# Altium PCB Node.PcbDoc
Units mm, origin at the board's own origin, x right, y up, seen from the top; angles counter-clockwise.
Board outline 152.4 x 101.6 mm, 2 copper layers (Top Layer, Bottom Layer); 46 components, 43 nets, 215 pads, 0 vias.
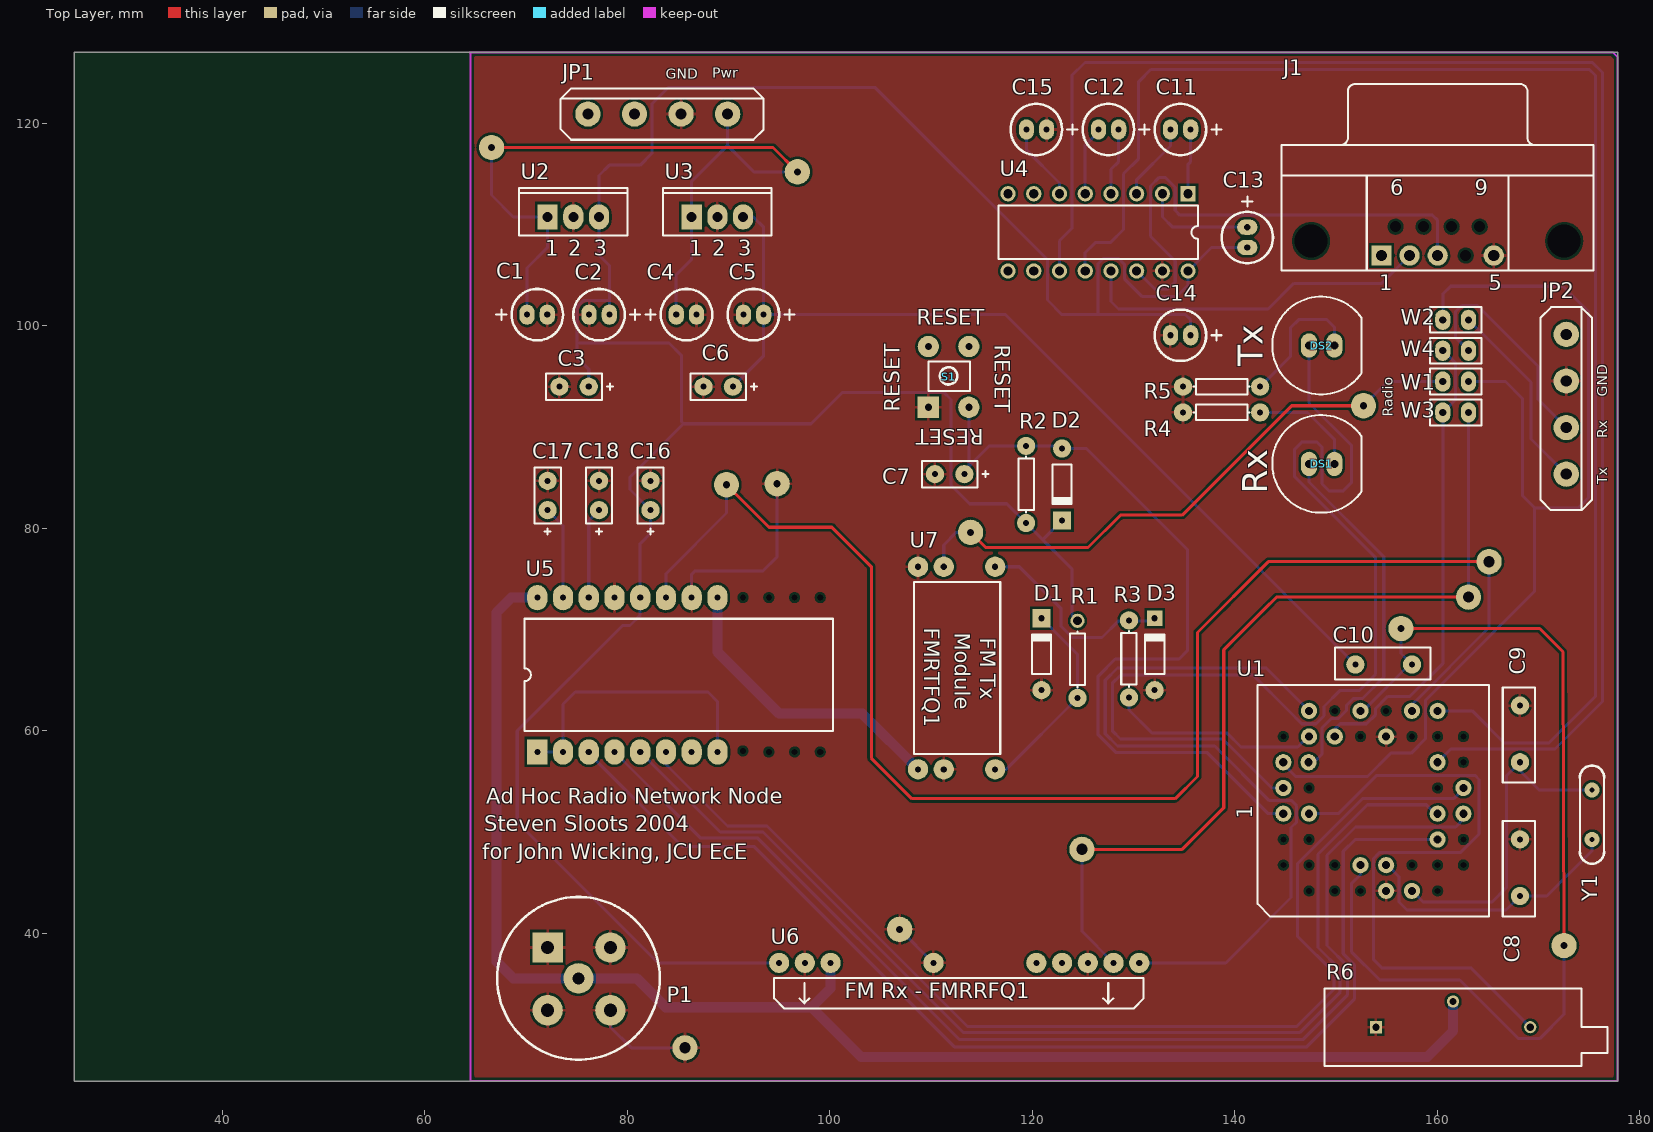
[diagram p0: Top Layer view]
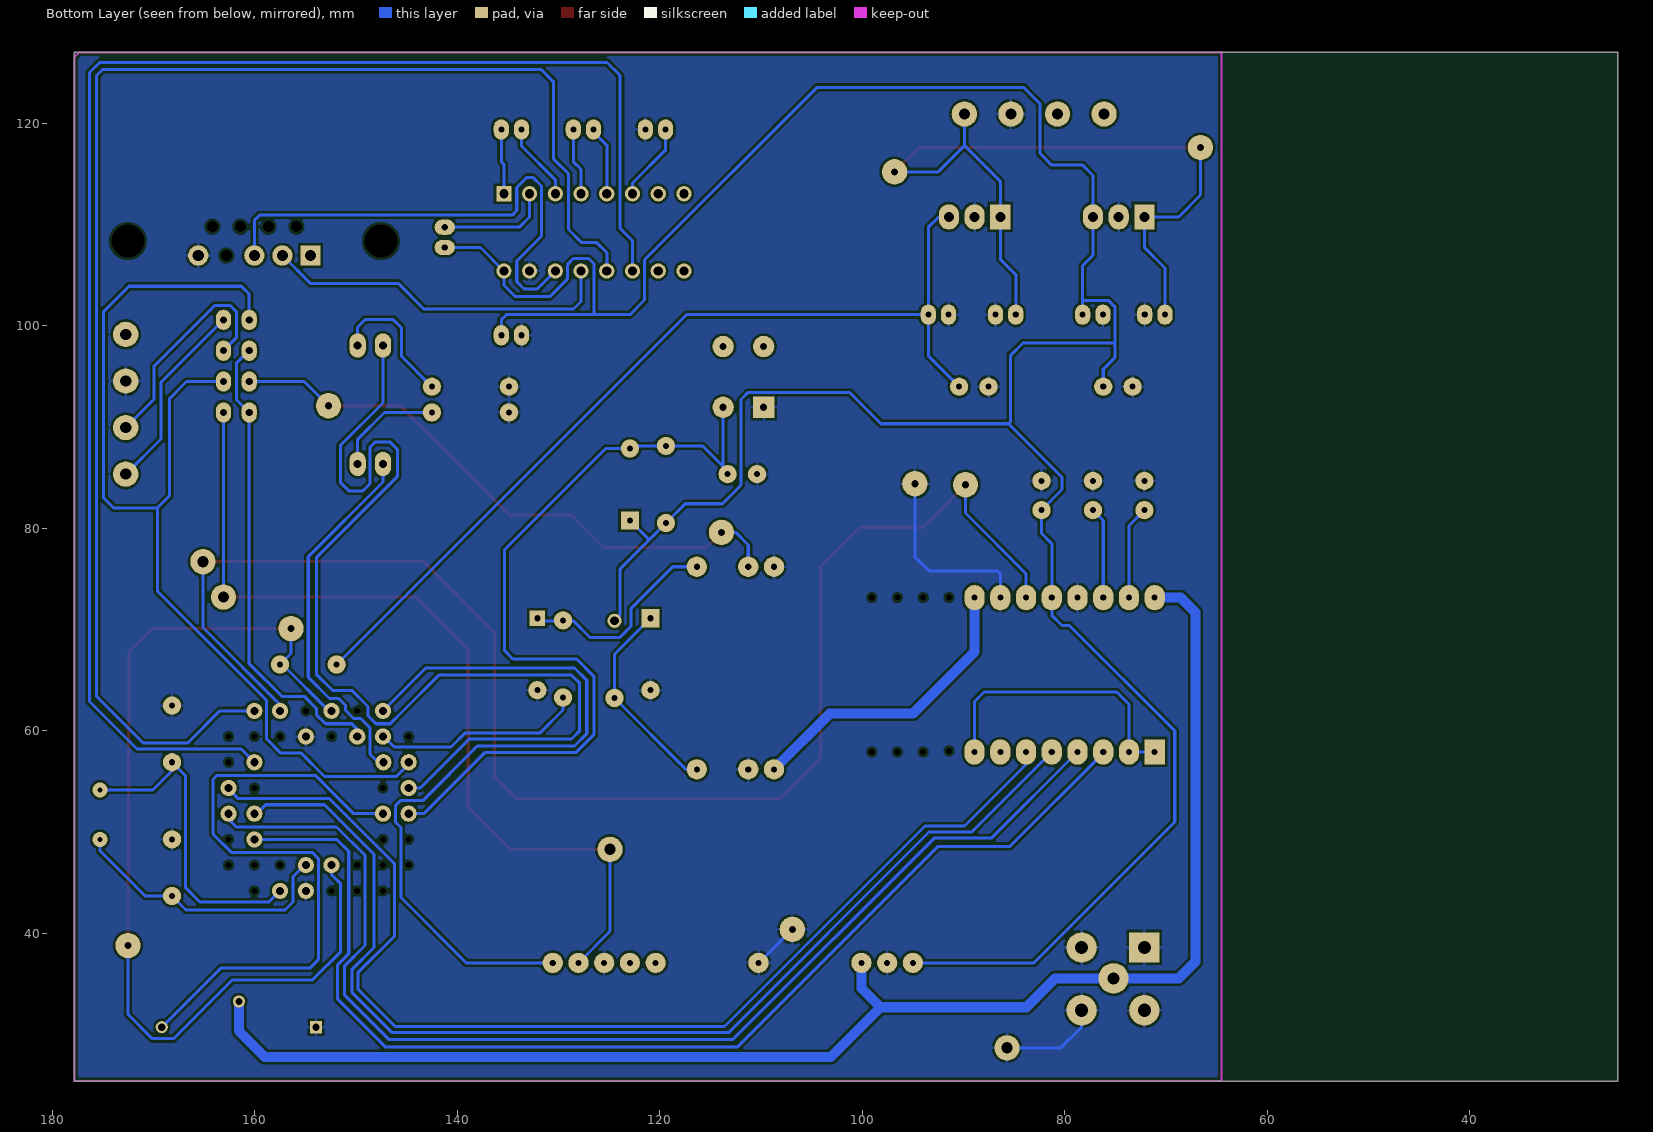
[diagram p1: Bottom Layer view, seen from below]

## Layer stack, top to bottom
Top Layer: signal copper 0.0356
Dielectric: dielectric 0.32, FR-4, Dk 4.8
Bottom Layer: signal copper 0.0356

## Board outline
25.4,25.4 177.8,25.4 177.8,127 25.4,127

## Design rules (kind name [scope] priority, off if disabled: settings)
Clearance [All] p1: gap=0.254
ComponentClearance [All] p1: gap=0.254 collisioncheckmode=0
HoleSize [All] p1 off: absolutevalues=TRUE maxlimit=2.54 minlimit=0.025 maxpercent=80.000 minpercent=20.000
PlaneConnect [All] p1: planeconnectstyle=Relief reliefexpansion=0.508 reliefentries=4 reliefconductorwidth=0.5 reliefairgap=0.254
PolygonConnect [All] p1: connectstyle=Relief reliefconductorwidth=0.254 reliefentries=4 polygonreliefangle="90 Angle"
RoutingLayers [All] p1: top layer="Not Used" bottom layer=Any
RoutingVias [All] p1: holewidth=0.711 width=1.27 viastyle="Through Hole" minholewidth=0.711 minwidth=1.27 maxholewidth=0.711 maxwidth=1.27
SolderMaskExpansion [All] p1: expansion=0.102
TestPointUsage [All] p1: valid=0 allowmultiple=FALSE
Testpoint [All] p1: side=15 testpointundercomponent=TRUE minsize=1.016 maxsize=2.54 preferedsize=1.524 minholesize=0 maxholesize=1.016 preferedholesize=0.813 testpointgrid=0.025 style=1023 order=1234567890
Width Width_2 [InNet('NetU5_16')] p1: maxlimit=1 minlimit=0.254 preferedwidth=0.254 toplayer_prefwidth=1 bottomlayer_prefwidth=1 minimp=50.000000 maximp=50.000000 favimp=50.000000
Width Width_1 [InNet('NetP1_1')] p2: maxlimit=1 minlimit=0.254 preferedwidth=0.254 toplayer_minwidth=1 toplayer_prefwidth=1 bottomlayer_minwidth=1 bottomlayer_prefwidth=1 minimp=50.000000 maximp=50.000000 favimp=50.000000
Width [All] p3: maxlimit=0.4 minlimit=0.2 preferedwidth=0.254 toplayer_prefwidth=0.3 bottomlayer_prefwidth=0.3 minimp=50.000000 maximp=50.000000 favimp=50.000000
14 further rules are at their usual default settings.

## Components (designator, comment, footprint, x,y, rotation, side; value= is the part's Value field where it differs from the comment)
C1 "Cap" "2mm Pol. Cap" 70.104,101.092 r0 top
C2 "Cap" "2mm Pol. Cap" 78.232,101.092 r180 top
C3 "Cap" "5mm Tant. Cap" 76.2,93.98 r180 top
C4 "Cap" "2mm Pol. Cap" 84.836,101.092 r0 top
C5 "Cap" "2mm Pol. Cap" 93.472,101.092 r180 top
C6 "Cap" "5mm Tant. Cap" 90.424,93.98 r180 top
C7 "0.1uF" "5mm Tant. Cap" 113.284,85.344 r180 top
C8 "Cap" "5.6mm Ceramic Cap" 168.148,43.688 r90 top
C9 "Cap" "5.6mm Ceramic Cap" 168.148,56.896 r90 top
C10 "Cap" "5.6mm Ceramic Cap" 151.892,66.548 r0 top
C11 "Cap Pol1" "2mm Pol. Cap" 135.636,119.38 r180 top
C12 "Cap Pol1" "2mm Pol. Cap" 128.524,119.38 r180 top
C13 "Cap Pol1" "2mm Pol. Cap" 141.224,109.728 r270 top
C14 "Cap Pol1" "2mm Pol. Cap" 135.636,99.06 r180 top
C15 "Cap Pol1" "2mm Pol. Cap" 121.412,119.38 r180 top
C16 "" "5mm Tant. Cap" 82.296,81.788 r90 top
C17 "" "5mm Tant. Cap" 72.136,81.788 r90 top
C18 "" "5mm Tant. Cap" 77.216,81.788 r90 top
D1 "3.3V BZX55-C3V3" DIO7.1-3.9X1.9#1 120.904,67.564 r90 top
D2 "1N914 Diode" DIO7.1-3.9X1.9#1 122.936,84.328 r270 top
D3 "3.3V Zener" DIO7.1-3.9X1.9#2 132.08,67.564 r90 top
DS1 "LED0" LED 147.32,86.36 r0 top
DS2 "LED0" LED 147.32,98.044 r0 top
J1 "D Connector 9" DSUB1.385-2H9 160.02,117.856 r0 top
JP1 "Header 4" "4 Way Terminal Block" 89.916,120.904 r180 top
JP2 "Header 4" "4 Way Terminal Block" 172.72,85.344 r90 top
P1 "BNC" "PCB BNC Connector - duplicate" 72.136,38.608 r0 top
R1 "" AXIAL-0.3#1 124.46,67.056 r90 top
R2 "Res1" AXIAL-0.3#2 119.38,84.328 r270 top
R3 "Res1" AXIAL-0.3#2 129.54,67.1 r270 top
R4 "Res1" AXIAL-0.3#2 138.684,91.44 r180 top
R5 "Res1" AXIAL-0.3#2 138.684,93.98 r180 top
R6 "RPot2" VR2 161.544,32.004 r0 top
S1 "SW-PB" "Reset Switch - duplicate" 109.728,91.948 r90 top
U1 "PIC18C452_PLCC" "PLCC Socket 44 way" 144.78,44.196 r90 top (schematic designator *)
U2 "LM340T5.0" SFM-T3/A4.7V 74.676,110.744 r0 top
U3 "LM340T5.0" SFM-T3/A4.7V 88.9,110.744 r0 top
U4 "MAX232EPE" DIP-16/X1.5 126.492,109.22 r180 top
U5 "AD8369" "24 pin DIP socket for TSSOP" 71.12,57.912 r90 top
U6 "FMRRFQ1 FM Rx" FMRRFQ1 94.996,37.084 r0 top
U7 "FMRTFQ1 FM Tx" FMRTFQ1 116.332,76.2 r270 top
W1 "Jumper" RAD-0.1 163.068,94.488 r180 top
W2 "Jumper" RAD-0.1 160.528,100.584 r0 top
W3 "Jumper" RAD-0.1 163.068,91.44 r180 top
W4 "Jumper" RAD-0.1 163.068,97.536 r180 top
Y1 "XTAL" XTAL 175.26,49.276 r90 top

## Footprints (in the part's own frame and the unit in brackets; to place one, negate y for a bottom-side part, rotate by r counter-clockwise, add the part's x,y. Pads: shape width x height; smd on the part's side, far side on the other; paste and mask are expansions set on the pad)
"2mm Pol. Cap" [mm]
  oval 1.5x2 hole 0.6: 1(0,0) 2(2,0)
  silkscreen extent -3.05,-2.54 3.56,2.54
"4 Way Terminal Block" [mm]
  round 2.5 hole 1.1: 1(0,0) 2(4.6,0) 3(9.2,0) 4(13.8,0)
  silkscreen extent -3.56,-2.54 16.5,2.54
"5.6mm Ceramic Cap" [mm]
  round 1.8 hole 0.6: 1(0,0) 2(5.6,0)
  silkscreen extent -2,-1.5 7.4,1.7
"5mm Tant. Cap" [mm]
  round 1.8 hole 0.6: 1(0,0) 2(2.9,0)
  silkscreen extent -2.4,-1.3 4.2,1.3
"24 pin DIP socket for TSSOP" [mm]
  rect 2.5x2 hole 0.6: 1(0,0)
  oval 2.5x2 hole 0.6: 2(0,-2.54) 3(0,-5.08) 4(0,-7.62) 5(0,-10.16) 6(0,-12.7) 7(0,-15.24) 8(0,-17.8) 9(15.24,0) 10(15.24,-2.54) 11(15.24,-5.08) 12(15.24,-7.62) 13(15.24,-10.16) 14(15.24,-12.7) 15(15.24,-15.24) 16(15.24,-17.78)
  round 0 hole 0.6: ""(0,-22.86) ""(0,-25.4) ""(0,-27.94) ""(0.1,-20.3) ""(15.24,-22.86) ""(15.24,-20.32) ""(15.24,-27.94) ""(15.24,-25.4)
  silkscreen extent 2.08,-29.21 13.16,1.27
AXIAL-0.3#1 [mm]
  round 1.8 hole 0.6: 1(-3.81,0)
  round 1.4 hole 0.85: 2(3.81,0)
  silkscreen extent -2.77,-0.76 2.77,0.76
AXIAL-0.3#2 [mm]
  round 1.8 hole 0.6: 1(-3.81,0) 2(3.81,0)
  silkscreen extent -2.77,-0.76 2.77,0.76
DIO7.1-3.9X1.9#1 [mm]
  round 1.8 hole 0.6: 1(-3.55,0)
  rect 1.8x1.8 hole 0.6: 2(3.55,0)
  silkscreen extent -1.95,-0.95 2.05,0.95
DIO7.1-3.9X1.9#2 [mm]
  round 1.8 hole 0.6: 1(-3.55,0)
  rect 1.5x1.5 hole 0.6: 2(3.55,0)
  silkscreen extent -1.95,-0.95 2.05,0.95
DIP-16/X1.5 [mm]
  rect 1.5x1.5 hole 0.9: 1(-8.89,-3.81)
  round 1.5 hole 0.9: 2(-6.35,-3.81) 3(-3.81,-3.81) 4(-1.27,-3.81) 5(1.27,-3.81) 6(3.81,-3.81) 7(6.35,-3.81) 8(8.89,-3.81) 9(8.89,3.81) 10(6.35,3.81) 11(3.81,3.81) 12(1.27,3.81) 13(-1.27,3.81) 14(-3.81,3.81) 15(-6.35,3.81) 16(-8.89,3.81)
  silkscreen extent -9.85,-2.65 9.85,2.65
DSUB1.385-2H9 [mm]
  rect 2x2 hole 1.09: 1(-5.54,-10.92)
  round 2 hole 1.09: 2(-2.77,-10.92) 3(0,-10.92) 5(5.54,-10.92)
  round 0 hole 1.09: 4(2.77,-10.92) 6(-4.155,-8.08) 7(-1.385,-8.08) 8(1.385,-8.08) 9(4.155,-8.08)
  round 0 hole 3.26: 10(-12.495,-9.5) 11(12.495,-9.5)
  silkscreen extent -15.4,-12.4 15.4,6
FMRRFQ1 [mm]
  round 2 hole 0.6: 1(0,0) 2(2.54,0) 3(5.08,0) 7(15.24,0) 11(25.4,0) 12(27.94,0) 13(30.48,0) 14(33.02,0) 15(35.56,0)
  silkscreen extent -0.5,-4.5 36,-1.5
FMRTFQ1 [mm]
  round 2 hole 0.6: 1(0,0) 2(0,-5.08) 3(0,-7.62) 4(20,0) 5(20,-5.08) 6(20,-7.62)
  silkscreen extent 1.5,-8 18.5,0.5
LED [mm]
  oval 1.6x2.4 hole 0.8: 1(0,0) 2(2.5,0)
  silkscreen extent -3.62,-4.82 5.2,4.82
"PCB BNC Connector - duplicate" [mm]
  round 3 hole 1.2: 0(3.048,-3.048)
  rect 3x3 hole 1.3: 1(0,0)
  round 3 hole 1.3: 2(6.2,0) 3(0,-6.2) 4(6.2,-6.2)
  silkscreen extent -4.98,-11.08 11.08,4.98
"PLCC Socket 44 way" [mm]
  round 0 hole 0.6: 1(10.16,-2.54) 4(5.08,0) 5(5.08,-2.54) 6(2.54,0) 7(0,-2.54) 8(2.54,-2.54) 9(0,-5.08) 10(2.54,-5.08) 11(0,-7.62) 16(2.54,-12.7) 17(0,-15.24) 18(2.54,-17.78) 19(2.54,-15.24) 20(5.08,-17.78) 25(10.16,-15.24) 26(12.7,-17.78) 28(15.24,-17.78) 30(15.24,-15.24) 32(15.24,-12.7) 33(17.78,-10.16) 36(15.24,-7.62) 37(17.78,-5.08) 40(15.24,0)
  round 1.6 hole 0.8: 2(7.62,0) 3(7.62,-2.54) 12(2.54,-7.62) 13(0,-10.16) 14(2.54,-10.16) 15(0,-12.7) 21(5.08,-15.24) 22(7.62,-17.78) 23(7.62,-15.24) 24(10.16,-17.78) 27(12.7,-15.24) 29(17.78,-15.24) 31(17.78,-12.7) 34(15.24,-10.16) 35(17.78,-7.62) 38(15.24,-5.08) 39(17.78,-2.54) 41(15.24,-2.54) 42(12.7,0) 43(12.7,-2.5) 44(10.16,0)
  silkscreen extent -2.54,-20.32 20.32,2.54
RAD-0.1 [mm]
  oval 1.5x2 hole 0.7: 1(0,0) 2(2.54,0)
  silkscreen extent -1.27,-1.27 3.81,1.27
"Reset Switch - duplicate" [mm]
  rect 2.1x2.1 hole 0.7: 1(0,0)
  round 2.1 hole 0.7: 2(0,-4) ""(6,-4) ""(6,0)
  silkscreen extent 1.6,-4.1 4.5,0
SFM-T3/A4.7V [mm]
  rect 2x2.5 hole 1: 1(-2.54,0)
  oval 2x2.5 hole 1: 2(0,0) 3(2.54,0)
  silkscreen extent -5.35,-1.85 5.35,2.85
VR2 [mm]
  rect 1.2x1.2 hole 0.7: 1(-7.62,-1.27)
  round 1.2 hole 0.7: 2(0,1.27) 3(7.62,-1.27)
  silkscreen extent -12.7,-5.08 15.24,2.54
XTAL [mm]
  round 1.5 hole 0.5: 1(0,0) 2(4.88,0)
  silkscreen extent -2.4,-1.2 7.3,1.2

## Part data
C1 C2 C3 C4 C5 C6 C8 C9 C10: "Capacitor"
C7: library part CAP, "Capacitor"
C11 C12 C13 C14 C15: "Polarized Capacitor (Radial)"
C16 C17 C18: library part Cap, "Capacitor"
D1 D3: library part "D Zener", "Zener Diode"
D2: library part Diode, "Default Diode"
DS1 DS2: "Typical INFRARED GaAs LED"
J1: "Receptacle Assembly, 9 Position, Right Angle"
JP1 JP2: "Header, 4-Pin"
P1: "BNC Elbow Connector"
R1: library part Res1, "Resistor"
R2 R3 R4 R5: "Resistor"
R6: "Potentiometer"
S1: "Switch"
U2 U3: "Series 3-Terminal Positive Regulator"
U4: "+5V Powered RS-232 Driver/Receiver"
U5: library part AD8369_DIGITAL_CONT_PWR_AMP
U6: library part FMRRFQ1
U7: library part FMRTFQ1
W1 W2 W3 W4: "Jumper Wire"
Y1: "Crystal Oscillator"

## Free pads (board coordinates)
  round 2.5 hole 0.7: 0(156.4,70.1) 1(172.5,38.8) 2(89.8,84.3) 3(152.7,92.1) 4(113.9,79.6) 13(96.8,115.2) 14(66.6,117.6) 15(106.9,40.4) 17(94.8,84.4)
  round 2.5 hole 1.1: 3(165.1,76.7) 4(163.068,73.2) 5(124.9,48.3) 18(85.7,28.7)

## Nets (pads, with @x,y where several pads share a name; then routed paths per layer and width w, separated by ;. In a path a pad name is that pad's centre, name@x,y a point inside that pad or via, vN(x,y) a via of type N, cw(c..) or ccw(c..) an arc to the next point about the centre after c; other vN are vias at no path point)
GND: C1.2 C2.2 C3.2 C4.2 C5.2 C6.2 C7.2 C8.2 C9.2 C14.2 C15.1 C16.2 C17.2 C18.2 D1.1 D3.1 J1.5 JP1.2 JP2.3 P1.1 P1.2 P1.3 P1.4 pad.15 pad.17 pad.18 R4.2 R5.2 R6.1 S1.1 U1.13 U1.34 U2.2 U3.2 U4.15 U5.12 U5.15 U6.2 U6.7 U6.13 U7.3 U7.5 | length 33.2
  Bottom Layer w0.3: P1.4 78.336,30.764 80.4,28.7 pad.18 ; U5.15 86.36,75.46 86.7,75.8 93.4,75.8 94.8,77.2 pad.17 ; pad.15 110.216,37.084 U6.7
NetC1_1: C1.1 C4.1 JP1.1 pad.13 pad.14 U2.1 U3.1 | length 82.7
  Top Layer w0.3: pad.14 94.4,117.6 pad.13
  Bottom Layer w0.3: pad.14 66.6,112.9 68.756,110.744 U2.1 72.136,107.736 70.104,105.704 C1.1 ; C4.1 84.836,105.036 86.36,106.56 U3.1 86.36,114.26 89.916,117.816 ; JP1.1 89.916,117.816 ; pad.13 92.5,115.2 89.916,117.784 89.916,117.816
NetC7_1: C7.1 D2.1 R2.1 S1.2 U1.2 | length 80.4
  Bottom Layer w0.3: C7.1 113.728,85.788 S1.2 ; 113.828,86.2 115.766,88.138 122.676,88.138 D2.1 125.322,87.878 135.3,77.9 135.3,67.9 134.5,67.1 128.2,67.1 126.5,65.4 126.5,59.6 128.223,57.877 137.223,57.877 143.284,51.816 U1.2
NetC8_1: C8.1 U1.14 Y1.1 | length 27.2
  Bottom Layer w0.3: U1.14 155.064,46.736 156.2,45.6 156.2,43.1 157,42.3 166.76,42.3 C8.1 170.788,43.688 175.26,48.16 Y1.1
NetC9_1: C9.1 U1.15 Y1.2 | length 32
  Bottom Layer w0.3: U1.15 157.504,44.196 158.6,43.1 165.4,43.1 166.8,44.5 166.8,55.548 C9.1 168.148,56.052 170.044,54.156 Y1.2
NetC10_2: C10.2 pad.0 pad.1 U1.12 U1.35 | length 98.2
  Top Layer w0.3: pad.0 170.1,70.1 172.4,67.8 pad.1
  Bottom Layer w0.3: U1.12 152.4,45.8 151.5,44.9 151.5,38.2 154.3,35.4 162.2,35.4 168,29.6 170.1,29.6 172.5,32 pad.1 ; U1.35 152.676,61.976 157.248,66.548 C10.2 156.4,67.64 pad.0
NetC11_1: C11.1 U4.1 | length 6.5
  Bottom Layer w0.3: U4.1 135.382,115.951 135.636,116.205 C11.1
NetC11_2: C11.2 U4.3 | length 7.7
  Bottom Layer w0.3: U4.3 130.302,114.42 133.636,117.754 C11.2
NetC12_1: C12.1 U4.4 | length 6.7
  Bottom Layer w0.3: U4.4 127.762,115.443 128.524,116.205 C12.1
NetC12_2: C12.2 U4.5 | length 6.9
  Bottom Layer w0.3: U4.5 125.222,117.824 126.524,119.126 C12.2
NetC13_1: C13.1 U4.2 | length 11.1
  Bottom Layer w0.3: U4.2 132.842,110.744 133.858,109.728 C13.1
NetC15_2: C15.2 U4.6 | length 7.7
  Bottom Layer w0.3: C15.2 119.412,117.367 122.682,114.097 U4.6
NetC17_1: C17.1 U5.10 | length 9.3
  Bottom Layer w0.3: C17.1 73.66,80.264 U5.10
NetC18_1: C18.1 U5.11 | length 9.1
  Bottom Layer w0.3: U5.11 76.2,80.772 C18.1
NetD1_2: D1.2 R1.1 U7.4 | length 20.4
  Bottom Layer w0.3: U7.4 117.414,56.2 R1.1 124.46,67.558 D1.2
NetD3_2: D3.2 R3.1 U7.1 | length 20.5
  Bottom Layer w0.3: U7.1 118.72,76.2 122.809,72.111 122.809,70.358 123.952,69.215 126.873,69.215 128.524,70.866 131.832,70.866 D3.2
NetDS1_1: DS1.1 U1.43 | length 36.8
  Bottom Layer w0.3: U1.43 147.796,56.896 148.6,57.7 148.6,60.3 149.526,61.226 150.226,61.226 151,62 151,62.5 151.7,63.2 152.6,63.2 154.7,65.3 154.7,77.2 147.32,84.58 DS1.1
NetDS1_2: DS1.2 R4.1 | length 10.8
  Bottom Layer w0.3: R4.1 147.16,91.44 149.82,88.78 DS1.2
NetDS2_1: DS2.1 U1.44 | length 105.9
  Bottom Layer w0.3: U1.44 143.644,54.356 138.8,59.2 128.7,59.2 127.9,60 127.9,64.7 128.7,65.5 141.8,65.5 145.4,61.9 146.6,60.7 148,60.7 148.8,61.5 148.8,62.4 150.4,64 152.3,64 153.9,65.6 153.9,77.1 145.9,85.1 145.9,87.8 146.6,88.5 148.1,88.5 148.6,88 148.6,84.4 149.3,83.7 150.7,83.7 151.532,84.532 151.532,88.168 147.32,92.38 DS2.1
NetDS2_2: DS2.2 R5.1 | length 13.9
  Bottom Layer w0.3: R5.1 145.5,96.986 145.5,99.8 146.3,100.6 149.1,100.6 149.82,99.88 DS2.2
NetJ1_2: J1.2 U4.13 | length 35
  Bottom Layer w0.3: U4.13 127.762,102.387 128.499,101.651 143.285,101.651 145.825,104.191 154.505,104.191 J1.2
NetJ1_3: J1.3 U4.14 | length 50.6
  Bottom Layer w0.3: U4.14 132.08,103.632 133.387,103.632 134.112,104.357 134.112,106.402 131.674,108.84 131.674,113.792 132.537,114.656 133.096,114.656 134.112,113.64 134.112,111.379 134.569,110.922 159.512,110.922 160.02,110.414 J1.3
NetJP2_1: JP2.1 W2.2 | length 19.2
  Bottom Layer w0.3: W2.2 169.24,94.412 169.24,88.824 JP2.1
NetJP2_2: JP2.2 W4.1 | length 23.1
  Bottom Layer w0.3: W4.1@163.068,98.12 W4.1 161.8,98.804 161.8,101.4 162.406,102.006 163.932,102.006 169.926,96.012 169.926,92.738 JP2.2
NetP1_1: P1.0 R6.2 U5.9 U6.3 | length 146.6
  Bottom Layer w1: U5.9 68.552,73.152 67.1,71.7 67.1,37.2 68.74,35.56 80.94,35.56 83.8,32.7 98.2,32.7 ; U6.3 100.076,34.576 98.2,32.7 ; R6.2 161.544,30.344 159,27.8 103.1,27.8 98.2,32.7
NetR3_2: R3.2 U1.41 | length 21
  Bottom Layer w0.3: R3.2 129.54,62.06 131.8,59.8 139.2,59.8 140.6,58.4 146.2,58.4 147.236,59.436 U1.41
NetR6_3: R6.3 U1.3 | length 63.5
  Bottom Layer w0.3: U1.3 150.216,51.816 154,55.6 163.7,55.6 164.1,55.2 164.1,49.8 162.3,48 154.3,48 153.7,47.4 153.7,37.4 154.5,36.6 163.298,36.6 R6.3
NetU1_21: U1.21 U5.3 | length 114.5
  Bottom Layer w0.3: U5.3 76.2,57.8 85.4,48.6 92.5,48.6 112.3,28.8 147.1,28.8 151.8,33.5 151.8,36.9 150.7,38 150.7,48.1 151.876,49.276 U1.21
NetU1_22: U1.22 U5.4 | length 116.1
  Bottom Layer w0.3: U5.4 87.252,49.4 92.9,49.4 112.8,29.5 146.7,29.5 151.1,33.9 151.1,36.8 149.1,38.8 149.1,47.7 151.9,50.5 161.8,50.5 162.56,51.26 U1.22
NetU1_23: U1.23 U5.5 | length 111
  Bottom Layer w0.3: U5.5 89.192,50 93.4,50 113.2,30.2 146.4,30.2 150.4,34.2 150.4,36.4 148.2,38.6 148.2,47.8 153.1,52.7 158.9,52.7 159.784,51.816 U1.23
NetU1_24: U1.24 U5.6 | length 113.1
  Bottom Layer w0.3: U5.6 83.82,56.68 89.9,50.6 93.8,50.6 113.6,30.8 146.1,30.8 149.8,34.5 149.8,36.1 146.2,39.7 146.2,46.9 152.6,53.3 161.6,53.3 162.56,54.26 U1.24 U1.24@162.344,54.356
NetU1_27: U1.27 U4.11 | length 154
  Bottom Layer w0.3: U4.11 122.682,108.382 123.9,109.6 123.9,124.7 125.2,126 175.3,126 176.3,125 176.3,62.9 171.6,58.2 161.324,58.2 U1.27
NetU1_29: U1.29 U4.12 | length 147.7
  Bottom Layer w0.3: U4.12 125.222,107.222 126.2,108.2 127.7,108.2 129,109.5 129,115 130.5,116.5 130.5,124.1 131.7,125.3 175,125.3 175.6,124.7 175.6,63.4 171,58.8 166.6,58.8 163.424,61.976 U1.29
NetU1_31: pad.2 pad.3@165.1,76.7 U1.31 U5.14 | length 148.5
  Top Layer w0.3: pad.2 94,80.1 100.2,80.1 104.1,76.2 104.1,57.3 108.1,53.3 134.1,53.3 136.3,55.5 136.3,69.7 143.3,76.7 pad.3@165.1,76.7
  Bottom Layer w0.3: U5.14 83.82,75.52 89.8,81.5 pad.2 ; U1.31@157.4,62.2 157.4,62.5 165.1,70.2 pad.3@165.1,76.7
NetU1_38: U1.38 W3.2 W4.2 | length 46.9
  Bottom Layer w0.3: U1.38 149.86,60.16 150.4,60.7 153,60.7 153.9,61.6 153.9,62.2 155.1,63.4 157.3,63.4 160.528,66.628 W3.2 161.8,92.712 161.8,96.3 160.564,97.536 W4.2 W4.2@160.528,97.072
NetU1_39: U1.39 U6.15 | length 76.6
  Bottom Layer w0.3: U6.15 139.084,37.084 145.546,43.546 145.546,50.446 146.1,51 146.1,52.6 145.6,53.1 143.4,53.1 138,58.5 128.4,58.5 127.2,59.7 127.2,65 128.4,66.2 143.096,66.2 U1.39 U1.39@147.424,61.976
NetU1_42: U1.42 W1.1 W2.1 | length 103.2
  Bottom Layer w0.3: U1.42 144.78,56.72 146,55.5 153.1,55.5 155.4,57.8 157.4,57.8 158.8,59.2 158.8,63 169.6,73.8 169.6,82 ; W2.1 160.528,103.128 161.3,103.9 172.4,103.9 174.9,101.4 174.9,83 173.9,82 169.6,82 ; W1.1 166.712,94.488 168.4,92.8 168.4,83.2 169.6,82
NetU5_1: U5.1 U5.2 U5.8 | length 28.4
  Bottom Layer w0.3: U5.1 U5.2 73.66,62.611 74.879,63.83 87.97,63.83 88.92,62.88 U5.8
NetU5_16: U5.16 U7.6 | length 30
  Bottom Layer w1: U5.16 88.9,67.8 95,61.7 103.212,61.7 U7.6
NetU6_14: pad.4@163.068,73.2 pad.5 U6.14 W3.1 | length 88.7
  Top Layer w0.3: pad.5 134.8,48.3 138.9,52.4 138.9,68 142.9,72 144.1,73.2 pad.4@163.068,73.2
  Bottom Layer w0.3: pad.5 124.9,40.2 U6.14 ; pad.4@163,72.9 163.068,72.968 W3.1
NetU7_2: pad.3@152.7,92.1 pad.4@113.9,79.6 U7.2 W1.2 | length 59.4
  Top Layer w0.3: pad.4@113.9,79.6 115.4,78.1 125.5,78.1 128.7,81.3 134.8,81.3 145.6,92.1 pad.3@152.7,92.1
  Bottom Layer w0.3: U7.2 111.252,78.352 112.5,79.6 pad.4@113.9,79.6 ; pad.3@152.7,92.1 155.1,94.5 W1.2
VCC: C2.1 C3.1 C13.2 C14.1 C16.1 D2.2 R1.2 R2.2 U2.3 U4.16 U5.13 U6.1 | length 286.8
  Bottom Layer w0.3: C3.1 76.2,95.707 75.057,96.85 75.057,98.298 ; C2.1 78.232,102.514 ; U6.1 83.058,37.084 69.139,51.003 69.139,59.995 79.553,70.409 80.264,70.409 81.28,71.425 U5.13 81.28,78.486 82.296,79.502 C16.1 80.264,83.82 80.264,85.039 85.547,90.322 ; D2.2 121.028,78.87 ; R1.2 123.901,71.425 123.901,75.997 121.028,78.87 ; C14.1 135.636,100.584 135.128,101.092 126.492,101.092 ; C13.2 137.7,107.728 U4.16 135.382,104.013 134.239,102.87 130.861,102.87 129.083,104.648 129.083,106.07 128.524,106.629 127,106.629 126.492,106.121 126.492,101.092 ; 75.057,98.298 84.125,98.298 85.344,97.079 85.344,90.526 85.547,90.322 ; 75.057,98.298 75.057,101.879 75.692,102.514 78.232,102.514 ; 78.232,102.514 78.232,105.943 77.216,106.959 U2.3 77.216,114.833 78.232,115.849 81.28,115.849 82.448,117.018 82.448,121.92 84.074,123.546 104.445,123.546 121.488,106.502 121.488,102.54 122.936,101.092 126.492,101.092 ; 85.547,90.322 98.146,90.322 101.244,93.421 111.252,93.421 111.963,92.71 111.963,84.252 113.792,82.423 117.475,82.423 R2.2 121.028,78.87
VDD: C5.1 C6.1 C10.1 U3.3 | length 92.2
  Bottom Layer w0.3: C6.1 93.472,97.028 C5.1 ; U3.3 92.456,110.744 93.472,109.728 C5.1 ; C10.1 117.348,101.092 C5.1
pads on no net: J1.1 J1.4 J1.6 J1.7 J1.8 J1.9 J1.10 J1.11 JP1.3 JP1.4 JP2.4 S1. U1.1 U1.4 U1.5 U1.6 U1.7 U1.8 U1.9 U1.10 U1.11 U1.16 U1.17 U1.18 U1.19 U1.20 U1.25 U1.26 U1.28 U1.30 U1.32 U1.33 U1.36 U1.37 U1.40 U4.7 U4.8 U4.9 U4.10 U5. U5.7 U6.11 U6.12

## Polygon pours and split planes (outlines as drawn)
GND on Top Layer (hatched 90Degree grid 0.1 track 0.2): 64.6,127 177.6,127 177.6,25.4 64.6,25.4
GND on Bottom Layer (hatched 90Degree grid 0.1 track 0.2): 64.6,127 177.8,127 177.8,25.4 64.4,25.4

## Keep-outs
Keep-Out Layer:
  lines w0.2: 64.4,127 177.292,127 177.8,126.492 177.8,25.4 64.516,25.4 64.516,25.908 64.5,127

## Silkscreen, mask and mechanical layers (free items; w line width, h text height)
Top Overlay:
  text "Pwr" at 88.4,124.5 h1
  text "GND" at 83.8,124.4 h1
  text "RESET" at 108.6,100.1 h1.5
  text "RESET" at 116.3,98.1 h1.5 r270
  text "Tx" at 142.748,96.012 h2.5 r90
  text "GND" at 176.784,92.964 h1 r90
  text "RESET" at 106.9,91.5 h1.5 r90
  text "Radio" at 155.6,91 h1 r90
  text "RESET" at 115.2,89.8 h1.5 r180
  text "Rx" at 176.784,88.9 h1 r90
  text "Tx" at 176.784,84.328 h1 r90
  text "Rx" at 143.2,83.4 h2.5 r90
  text "Ad Hoc Radio Network Node" at 66.1,52.8 h1.52
  text "Steven Sloots 2004" at 65.9,50.1 h1.52
  text "for John Wicking, JCU EcE" at 65.7,47.3 h1.52

## Text inside footprints (layer, text, board x,y; h text height)
J1: Top Overlay "6" at 155.365,112.881 h1.5; Top Overlay "9" at 163.675,112.881 h1.5; Top Overlay "5" at 165.06,103.481 h1.5; Top Overlay "1" at 154.23,103.481 h1.5
U1: Top Overlay "1" at 141.732,51.308 h1.52 r90
U2: Top Overlay "2" at 74.176,106.919 h1.5; Top Overlay "1" at 71.886,106.919 h1.5; Top Overlay "3" at 76.716,106.919 h1.5
U3: Top Overlay "2" at 88.4,106.919 h1.5; Top Overlay "1" at 86.11,106.919 h1.5; Top Overlay "3" at 90.94,106.919 h1.5
U6: Top Overlay "FM Rx - FMRRFQ1" at 101.496,33.584 h1.52
U7: Top Overlay "FMRTFQ1" at 109.332,70.2 h1.52 r270; Top Overlay "Module" at 112.332,69.7 h1.52 r270; Top Overlay "FM Tx" at 114.832,69.2 h1.52 r270